# Altium PCB MidBoard.PcbDoc (part 3 of 3)
Units mm, origin at the board's own origin, x right, y up, seen from the top; angles counter-clockwise.
Board outline 150.95 x 96 mm, 2 copper layers (Top Layer, Bottom Layer); 315 components, 238 nets, 1021 pads, 291 vias.
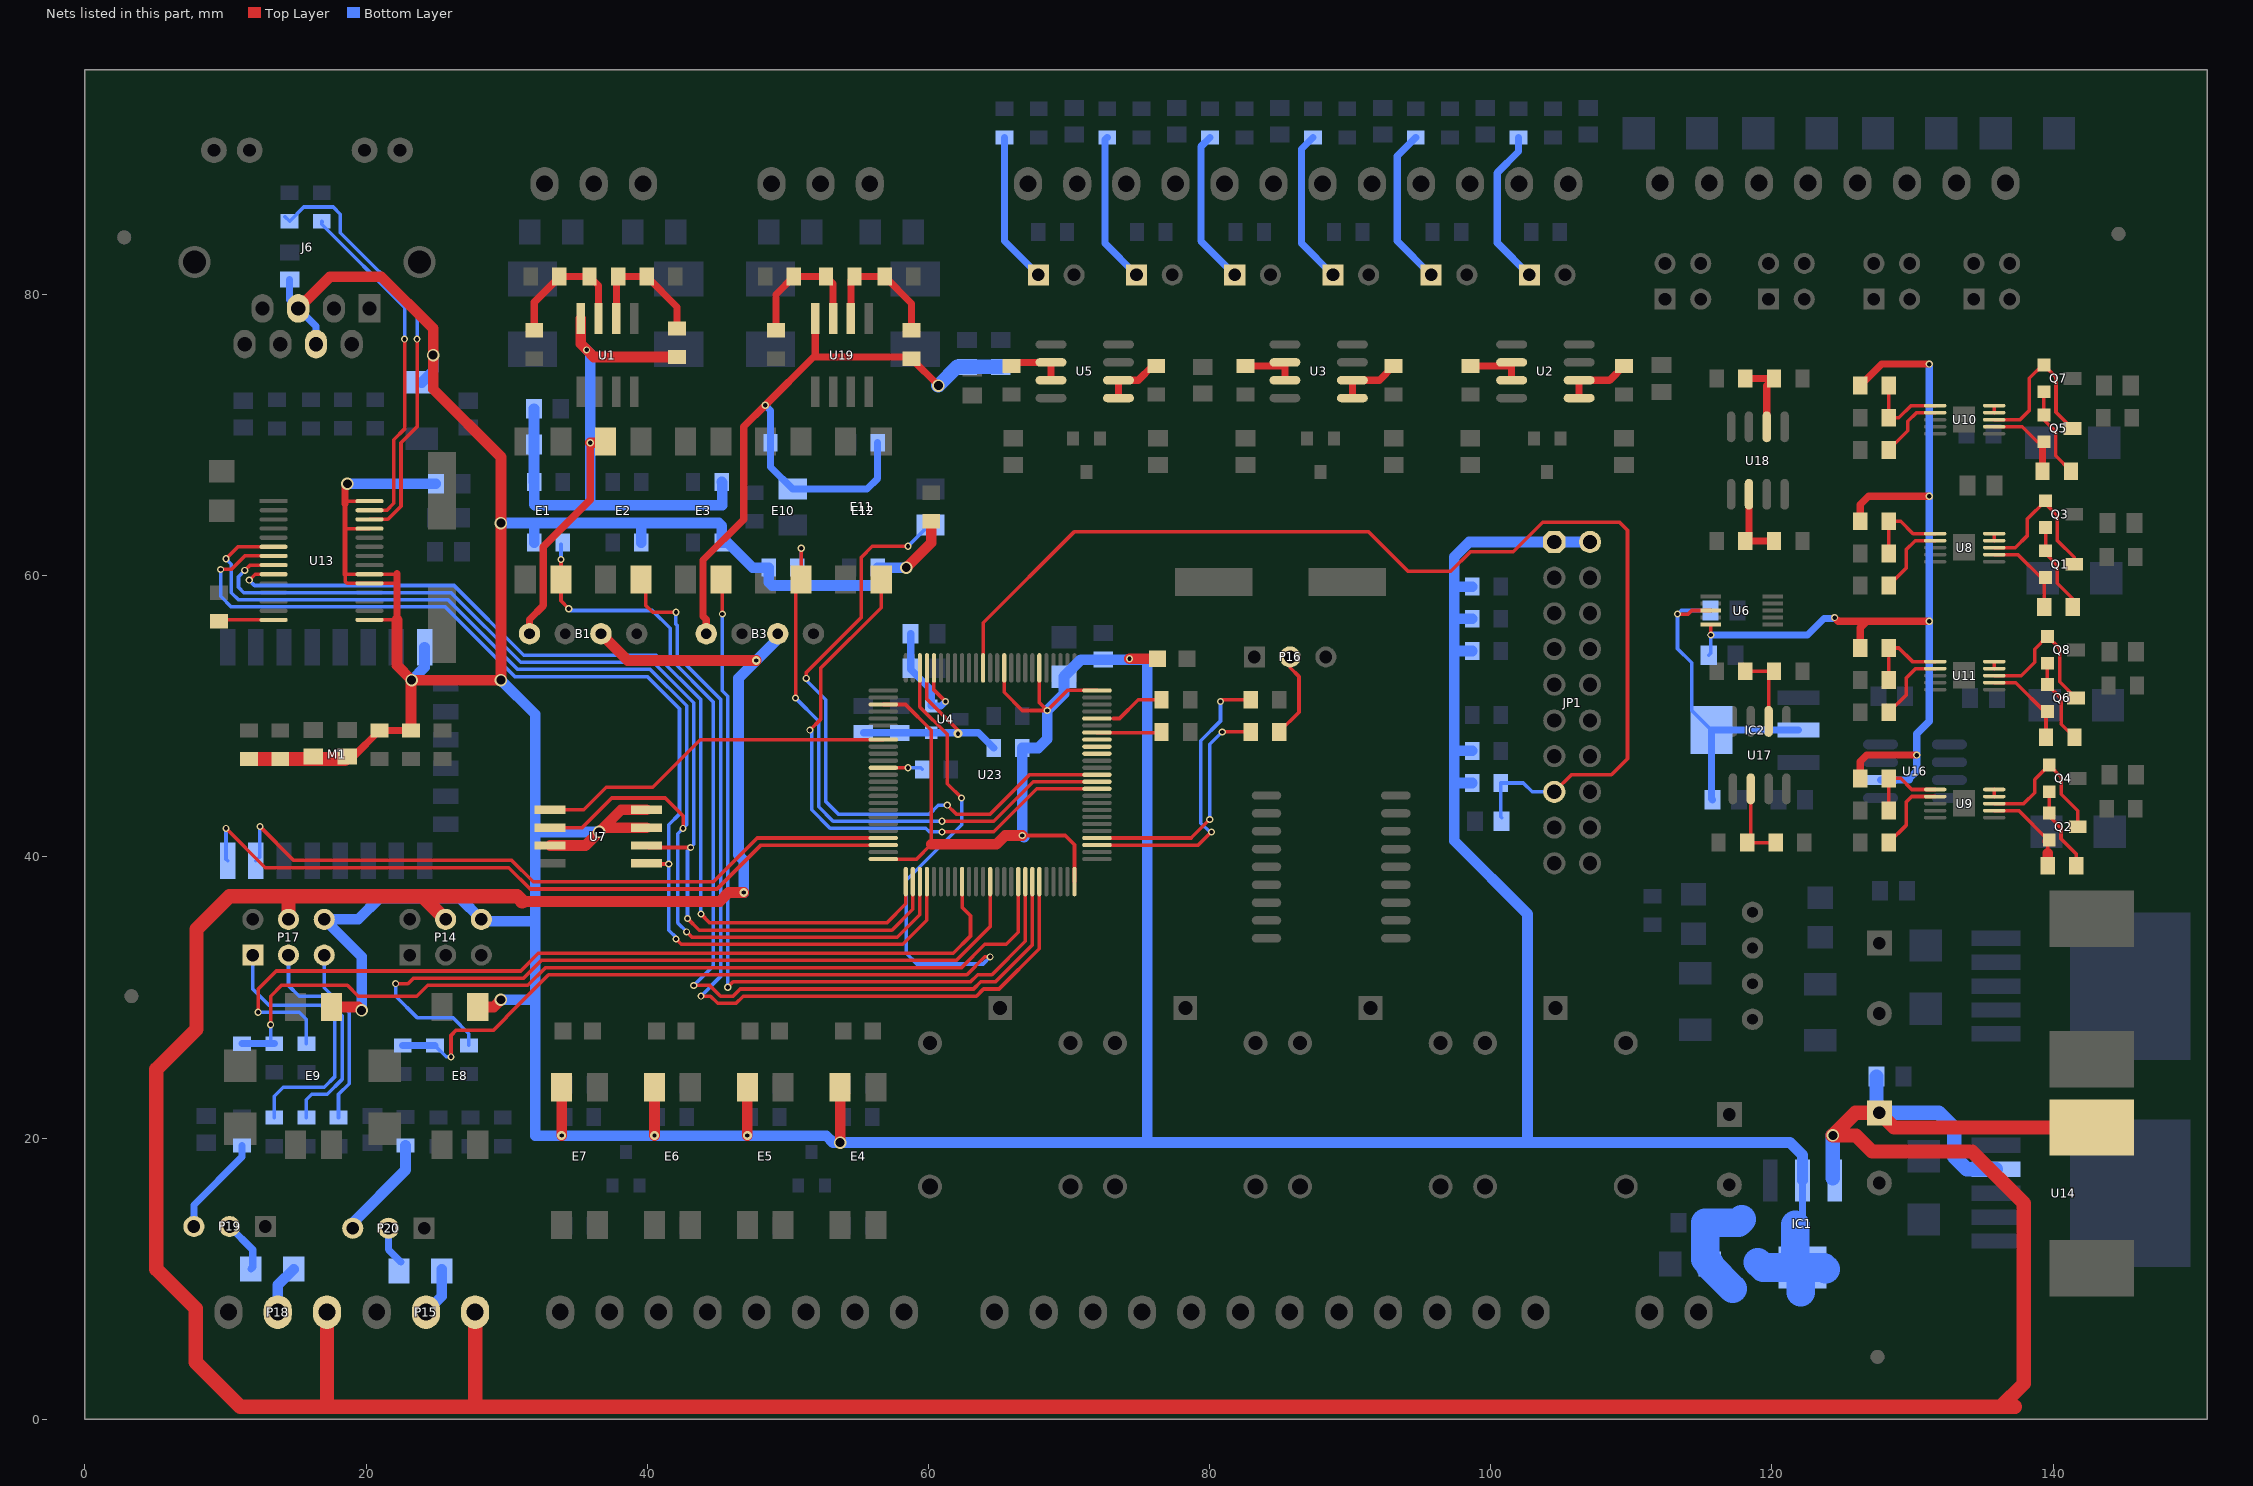
[diagram p3: the nets of this part, all layers, seen from the top]

## Via types
v1: diameter 0.508, hole 0.305, Top Layer to Bottom Layer, tented both sides, 235 vias
v2: diameter 0.635, hole 0.305, Top Layer to Bottom Layer, tented both sides, 33 vias
v3: diameter 0.889, hole 0.635, Top Layer to Bottom Layer, tented both sides, 18 vias
v4: diameter 5, hole 3.3, Top Layer to Bottom Layer, tented both sides, 4 vias
v5: diameter 0.889, hole 0.508, Top Layer to Bottom Layer, tented both sides, 1 vias

## Nets (pads, with @x,y where several pads share a name; then routed paths per layer and width w, separated by ;. In a path a pad name is that pad's centre, name@x,y a point inside that pad or via, vN(x,y) a via of type N, cw(c..) or ccw(c..) an arc to the next point about the centre after c; other vN are vias at no path point) (continued)
NetP16_2: P16.2 R126.2 | length 6.2
  Top Layer w0.254: R126.2@84.963,48.895 86.36,50.292 86.36,52.832 85.725,53.467 P16.2@85.725,54.229
NetP17_1: P17.1 R35.1 | length 19.6
  Bottom Layer w0.254: P17.1@11.938,33.02 11.938,30.607 13.081,29.464 16.764,29.464 17.78,28.448 17.78,24.384 17.018,23.622 14.097,23.622 13.462,22.987 R35.1@13.462,21.463
NetP17_3: P17.3 R36.1 | length 15.8
  Bottom Layer w0.254: P17.3@14.478,33.02 14.478,30.861 15.24,30.099 16.891,30.099 18.288,28.702 18.288,24.174 17.228,23.114 16.129,23.114 15.748,22.733 R36.1@15.748,21.463
NetP17_5: P17.5 R41.1 | length 12.6
  Bottom Layer w0.254: P17.5@17.018,33.02 17.018,30.69 18.796,28.912 18.796,23.876 18.034,23.114 R41.1@18.034,21.463
NetP19_2: P19.2 RT8.2 | length 3.8
  Bottom Layer w0.508: P19.2@10.287,13.716 11.938,12.065 11.938,10.82 RT8.2@11.798,10.681
NetP19_3: P19.3 R52.1 | length 7.2
  Bottom Layer w0.508: P19.3@7.747,13.716 7.747,15.24 11.176,18.669 R52.1@11.176,19.479
NetP20_2: P20.2 RT7.2 | length 2.8
  Bottom Layer w0.508: P20.2@21.59,13.589 21.59,12.065 RT7.2@22.479,11.176
NetP20_3: P20.3 R98.1 | length 7.4
  Bottom Layer w0.762: P20.3@19.05,13.589 19.05,13.97 22.806,17.726 R98.1@22.806,19.478
NetPAIJ1_1: PAIJ1.1 R18.1 | length 11.4
  Bottom Layer w0.508: R18.1@101.981,91.185 101.981,90.188 100.457,88.665 100.457,83.693 PAIJ1.1@102.743,81.407
NetPAIJ2_1: PAIJ2.1 R19.1 | length 11
  Bottom Layer w0.508: R19.1@87.35,91.185 86.531,90.366 86.531,83.649 PAIJ2.1@88.773,81.407
NetPAIJ3_1: PAIJ3.1 R20.1 | length 10.8
  Bottom Layer w0.508: R20.1@72.72,91.185 72.561,91.026 72.561,83.649 PAIJ3.1@74.803,81.407
NetPAIJ4_1: PAIJ4.1 R27.1 | length 11.3
  Bottom Layer w0.508: R27.1@94.665,91.185 93.345,89.865 93.345,83.82 PAIJ4.1@95.758,81.407
NetPAIJ5_1: PAIJ5.1 R28.1 | length 11.1
  Bottom Layer w0.508: R28.1@80.035,91.185 79.375,90.525 79.375,83.82 PAIJ5.1@81.788,81.407
NetPAIJ6_1: PAIJ6.1 R29.1 | length 10.8
  Bottom Layer w0.508: R29.1@65.405,91.185 65.405,83.82 PAIJ6.1@67.818,81.407
NetQ1_1: Q1.1 R46.1 U8.2 | length 6.3
  Top Layer w0.254: U8.2@135.811,61.502 137.507,61.502 139.23,59.779 139.367,59.779 R46.1@139.367,57.785
NetQ1_2: Q1.2 Q3.1 R46.2 | length 6.5
  Top Layer w0.254: Q3.1@139.469,63.436 Q1.2@139.469,61.785 139.469,61.557 140.307,60.719 140.307,59.464 141.399,58.372 R46.2@141.399,57.785
NetQ1_3: Q1.3 Q3.2 U8.3 | length 11.1
  Top Layer w0.254: U8.3@135.811,62.002 137.313,62.002 138.176,62.865 138.176,64.049 Q3.2@139.469,65.341 139.469,65.113 140.307,64.275 140.307,62.512 141.501,61.318 Q1.3@141.501,60.82
NetQ2_1: Q2.1 R48.1 U9.2 | length 6.7
  Top Layer w0.254: U9.2@135.811,43.299 137.549,43.299 139.621,41.227 139.621,41.11 139.621,40.259
  Top Layer w0.762: R48.1@139.621,39.37 139.621,40.259 ; Q2.1@139.621,41.11 Q2.1@139.723,41.212
NetQ2_2: Q2.2 Q4.1 R48.2 | length 6.1
  Top Layer w0.254: Q4.1@139.723,44.64 Q2.2@139.723,43.116 139.723,42.888 140.561,42.05 140.561,41.303 141.653,40.211 R48.2@141.653,39.37
NetQ2_3: Q2.3 Q4.2 U9.3 | length 10.8
  Top Layer w0.254: U9.3@135.811,43.799 137.906,43.799 138.684,44.577 138.684,45.507 Q4.2@139.723,46.545 140.589,45.679 140.589,44.45 141.755,43.284 Q2.3@141.755,42.151
NetQ5_1: Q5.1 R60.1 U10.2 | length 6
  Top Layer w0.254: U10.2@135.811,70.604 137.803,70.604 138.874,69.532 Q5.1@139.342,69.532
  Top Layer w0.508: R60.1@139.24,67.437 Q5.1@139.24,69.431
NetQ5_2: Q5.2 Q7.1 R60.2 | length 6.5
  Top Layer w0.254: Q7.1@139.342,73.088 Q5.2@139.342,71.437 139.342,71.097 140.18,70.259 140.18,68.529 R60.2@141.272,67.437
NetQ5_3: Q5.3 Q7.2 U10.3 | length 11.8
  Top Layer w0.254: U10.3@135.811,71.104 137.652,71.104 138.303,71.755 138.303,74.041 139.255,74.993 Q7.2@139.342,74.993 140.208,74.127 140.208,71.638 Q5.3@141.374,70.472
NetQ6_1: Q6.1 R62.1 U11.2 | length 6.5
  Top Layer w0.254: U11.2@135.811,52.401 137.337,52.401 Q6.1@139.494,50.244 ; R62.1@139.494,48.514 Q6.1@139.494,50.244 ; Q6.1@139.596,50.355 139.494,50.254 Q6.1@139.494,50.244
NetQ6_2: Q6.2 Q8.1 R62.2 | length 6.1
  Top Layer w0.254: Q8.1@139.596,53.784 Q6.2@139.596,52.26 140.589,51.267 140.589,49.451 R62.2@141.526,48.514
NetQ6_3: Q6.3 Q8.2 U11.3 | length 10.7
  Top Layer w0.254: U11.3@135.811,52.901 137.737,52.901 138.684,53.848 138.684,54.778 Q8.2@139.596,55.689 140.462,54.823 140.462,52.461 Q6.3@141.628,51.295
NetR1_2: R1.2 R4.1 R5.1 U1.6 | length 9.6
  Top Layer w0.508: U1.6@37.798,78.292 37.798,81.153 R5.1@37.925,81.28 R4.1@39.957,81.28 42.116,79.121 R1.2@42.116,77.597
NetR5_2: R5.2 R7.1 R8.1 U1.7 | length 10
  Top Layer w0.508: R8.1@31.956,77.47 31.956,79.454 33.734,81.232 R7.1@33.734,81.28 R5.2@35.893,81.28 36.528,80.645 U1.7@36.528,78.292
NetR30_1: R30.1 U5.1 U5.2 | length 4.4
  Top Layer w0.508: U5.1@73.52,72.644 U5.2@73.52,73.914 74.93,73.914 75.946,74.93 R30.1@76.2,74.93
NetR31_1: R31.1 U2.1 U2.2 | length 4.9
  Top Layer w0.508: U2.1@106.286,72.644 U2.2@106.286,73.914 108.458,73.914 R31.1@109.474,74.93
NetR32_1: R32.1 U3.1 U3.2 | length 4.6
  Top Layer w0.508: U3.1@90.157,72.644 U3.2@90.157,73.914 92.075,73.914 R32.1@93.091,74.93
NetR33_1: R33.1 U5.6 U5.7 | length 4.2
  Top Layer w0.508: R33.1@65.913,74.93 66.167,75.184 U5.6@68.72,75.184 U5.7@68.72,73.914
NetR34_2: R34.2 R103.1 R105.1 U19.6 | length 9.9
  Top Layer w0.508: U19.6@54.483,78.292 54.483,81.026 R105.1@54.737,81.28 R103.1@56.896,81.28 58.801,79.375 R34.2@58.801,77.47
NetR38_1: R38.1 U2.6 U2.7 | length 4
  Top Layer w0.508: R38.1@98.552,74.93 U2.6@101.232,74.93 ; U2.7@101.486,73.914 U2.6@101.486,75.184
NetR39_1: R39.1 U3.6 U3.7 | length 4
  Top Layer w0.508: R39.1@82.55,74.93 U3.6@85.23,74.93 ; U3.7@85.357,73.914 U3.6@85.357,75.184
NetR40_2: R40.2 R43.1 U17.2 | length 5.6
  Top Layer w0.254: R43.1@118.237,41.021 R40.2@120.269,41.021 ; R43.1@118.491,41.275 U17.2@118.491,44.844
NetR44_2: R44.2 R45.1 U17.6 | length 5.2
  Top Layer w0.254: R45.1@118.11,53.213 R44.2@120.142,53.213 ; U17.6@119.761,49.644 R44.2@119.761,52.832
NetR47_1: R47.1 U8.7 | length 5.4
  Top Layer w0.254: R47.1@128.318,59.309 129.54,60.531 129.54,61.849 130.193,62.502 U8.7@131.611,62.502
NetR49_2: R49.2 R53.1 U8.6 | length 5.9
  Top Layer w0.254: R53.1@128.318,61.595 R49.2@128.318,63.881 129.159,63.881 130.038,63.002 U8.6@131.611,63.002
NetR50_1: R50.1 U9.7 | length 5.6
  Top Layer w0.254: R50.1@128.318,41.021 129.54,42.243 129.54,43.894 129.945,44.299 U9.7@131.611,44.299
NetR51_2: R51.2 R55.1 U9.6 | length 5.9
  Top Layer w0.254: R55.1@128.318,43.307 R51.2@128.318,45.593 129.159,45.593 129.953,44.799 U9.6@131.611,44.799
NetR57_2: R57.2 R66.1 U18.2 | length 5.1
  Top Layer w0.508: R66.1@118.11,62.484 R57.2@120.142,62.484 ; R66.1@118.364,62.738 U18.2@118.364,65.799
NetR61_1: R61.1 U10.7 | length 4.8
  Top Layer w0.254: R61.1@128.318,68.961 129.667,70.31 129.667,70.993 130.278,71.604 U10.7@131.611,71.604
NetR63_2: R63.2 R67.1 U10.6 | length 5.9
  Top Layer w0.254: R63.2@128.318,73.533 R67.1@128.318,71.247 129.032,71.247 129.889,72.104 U10.6@131.611,72.104
NetR64_1: R64.1 U11.7 | length 5.3
  Top Layer w0.254: R64.1@128.318,50.292 129.54,51.514 129.54,52.705 130.236,53.401 U11.7@131.611,53.401
NetR65_2: R65.2 R69.1 U11.6 | length 5.3
  Top Layer w0.254: R69.1@128.318,52.578 128.318,54.15 ; R65.2@128.318,54.864 129.032,54.864 129.995,53.901 U11.6@131.611,53.901
NetR68_2: R68.2 R70.1 U18.6 | length 5.7
  Top Layer w0.508: R70.1@118.11,74.041 R68.2@120.142,74.041 119.634,73.533 U18.6@119.634,70.599
NetR86_2: R86.2 U13.27 | length 24.8
  Top Layer w0.254: U13.27@20.243,64.662 21.482,64.662 21.971,65.151 21.971,69.679 22.733,70.441 v1(22.733,76.835)
  Bottom Layer w0.254: R86.2@16.891,85.169 R86.2@16.843,85.217 16.843,85.011 22.733,79.121 v1(22.733,76.835)
NetR87_2: R87.2 U13.26 | length 30.9
  Top Layer w0.254: U13.26@20.243,64.012 21.55,64.012 22.479,64.941 22.479,69.469 23.622,70.612 v1(23.622,76.835)
  Bottom Layer w0.254: R87.2@14.22,85.554 R87.2@14.557,85.217 15.573,86.233 17.653,86.233 18.161,85.725 18.161,84.411 23.622,78.95 v1(23.622,76.835)
NetR88_1: R88.1 U13.14 | length 3.9
  Top Layer w0.254: R88.1@9.525,56.769 9.618,56.862 U13.14@13.418,56.862
NetR105_2: R105.2 R106.1 R107.1 U19.7 | length 9.8
  Top Layer w0.508: R107.1@49.149,77.47 49.149,80.01 R106.1@50.419,81.28 R105.2@52.705,81.28 53.213,80.772 U19.7@53.213,78.292
NetR116_2: R116.2 U23.37 | length 2.8
  Top Layer w0.254: U23.37@56.789,46.347 v1(58.539,46.347)
  Bottom Layer w0.254: v1(58.539,46.347) 59.444,46.347 R116.2@59.563,46.228
NetR121_1: R121.1 U23.96 | length 4
  Top Layer w0.254: 73.14,49.847 73.596,49.847 74.93,51.181 R121.1@76.581,51.181
NetR124_2: R124.2 U23.94 | length 4.8
  Top Layer w0.254: U23.94@71.989,48.847 76.533,48.847 R124.2@76.581,48.895 R124.2@76.708,49.022
NetU8_4: U8.4 U8.5 | length 0.5
  Top Layer w0.254: U8.4@135.811,62.502 U8.5@135.811,63.002
NetU9_4: U9.4 U9.5 | length 0.5
  Top Layer w0.254: U9.4@135.811,44.299 U9.5@135.811,44.799
NetU10_4: U10.4 U10.5 | length 0.5
  Top Layer w0.254: U10.4@135.811,71.604 U10.5@135.811,72.104
NetU11_4: U11.4 U11.5 | length 0.5
  Top Layer w0.254: U11.4@135.811,53.401 U11.5@135.811,53.901
PWM_IN1: R99.2 R100.1 U23.23 | length 75.6
  Top Layer w0.254: v1(26.035,25.781) 26.035,27.305 26.416,27.686 29.083,27.686 29.972,28.575 29.972,28.619 32.976,31.623 62.738,31.623 64.008,32.893 v1(64.389,32.893) ; U23.23@59.389,53.447 59.389,50.673 61.341,48.721 61.341,45.212 v1(62.357,44.196)
  Bottom Layer w0.254: R99.2@24.892,26.591 25.702,25.781 v1(26.035,25.781) ; v1(62.357,44.196) 62.357,42.282 58.42,38.345 58.42,33.147 59.182,32.385 63.881,32.385 v1(64.389,32.893)
  Bottom Layer w0.508: R100.1@22.606,26.591 R99.2@24.892,26.591
PWM_IN2: R54.2 R56.1 U23.67 | length 65
  Top Layer w0.254: v1(13.208,28.067) 13.208,30.099 13.982,30.873 18.669,30.873 19.443,30.099 23.61,30.099 24.384,30.873 31.508,30.873 32.766,32.131 62.357,32.131 64.008,33.782 65.532,33.782 66.389,34.639 U23.67@66.389,38.247
  Bottom Layer w0.254: R54.2@13.081,26.718 13.208,26.845 v1(13.208,28.067)
  Bottom Layer w0.508: R56.1@11.176,26.718 13.081,26.718 R54.2@13.462,26.718
PWM_IN_OUT1: P15.2 RT7.1 | length 3.5
  Bottom Layer w0.762: P15.2@24.257,7.62 25.387,8.75 RT7.1@25.387,10.681
PWM_IN_OUT2: P18.2 RT8.1 | length 3.5
  Bottom Layer w0.762: P18.2@13.716,7.62 13.716,9.55 RT8.1@14.846,10.681
PWM_OUT1: R97.2 U23.63 | length 55.2
  Top Layer w0.254: v1(22.098,30.988) 22.975,30.988 23.368,31.381 31.198,31.381 32.456,32.639 61.976,32.639 64.389,35.052 U23.63@64.389,38.247
  Bottom Layer w0.254: v1(22.098,30.988) 22.098,30.099 23.622,28.575 26.162,28.575 27.305,27.432 R97.2@27.305,26.591
PWM_OUT2: R42.2 U23.59 | length 63.4
  Top Layer w0.254: v1(12.319,28.956) 12.319,30.607 13.601,31.889 30.988,31.889 32.246,33.147 61.766,33.147 62.992,34.373 62.992,35.814 62.389,36.417 U23.59@62.389,38.247
  Bottom Layer w0.254: v1(12.319,28.956) 15.24,28.956 15.748,28.448 R42.2@15.748,26.718
RDY/ALERT1: U23.91
REF2.5V: C24.2 C55.2 U4.1 U23.21 | length 9.6
  Top Layer w0.254: U23.21@60.389,53.447 60.389,51.879 v1(61.214,51.054)
  Bottom Layer w0.508: C55.2@58.737,55.88 C24.2@58.737,53.419 58.737,53.336 60.198,51.875 U4.1@60.198,50.736 60.896,50.736 v1(61.214,51.054)
REF5V: C52.1 R49.1 R51.1 R63.1 R65.1 U6.10 U16.6 | length 70
  Top Layer w0.254: v1(115.656,55.794) U6.10@115.656,56.531
  Top Layer w0.508: v1(124.46,57.023) 124.714,56.769 126.746,56.769 ; R51.1@126.286,45.593 126.286,46.784 126.746,47.244 v1(130.302,47.244) ; R65.1@126.286,54.864 126.286,56.309 126.746,56.769 ; R49.1@126.286,63.881 126.286,65.072 126.873,65.659 v1(131.191,65.659) ; R63.1@126.286,73.533 127.81,75.057 v1(131.191,75.057) ; v1(131.191,56.769) 126.746,56.769
  Bottom Layer w0.254: C52.1@115.506,54.356 115.656,54.506 v1(115.656,55.794)
  Bottom Layer w0.508: v1(115.656,55.794) 122.526,55.794 123.696,56.963 124.4,56.963 v1(124.46,57.023) ; U16.6@127.725,45.466 129.794,45.466 129.794,45.593 130.302,46.101 v1(130.302,47.244) 130.302,48.768 131.191,49.657 v1(131.191,56.769) v1(131.191,65.659) v1(131.191,75.057)
RESET: C77.2 JP1.15 R122.1 U23.14 | length 83.6
  Top Layer w0.254: U23.14@63.889,53.447 63.889,56.65 70.358,63.119 91.313,63.119 94.107,60.325 97.155,60.325 98.552,61.722 101.596,61.722 103.694,63.819 109.155,63.819 109.728,63.246 109.728,46.99 108.585,45.847 105.737,45.847 JP1.15@104.519,44.629
  Bottom Layer w0.254: C77.2@100.774,42.799 100.711,42.862 R122.1@100.711,45.26 102.314,45.26 102.945,44.629 JP1.15@104.519,44.629
RS485_CON_1: E2.2 U23.70 | length 64.1
  Top Layer w0.254: E2.2@39.83,59.743 39.878,59.695 39.878,57.912 40.386,57.404 v1(42.037,57.404) ; v1(43.815,30.099) 44.494,30.099 45.002,29.591 46.311,29.591 46.819,30.099 63.413,30.099 63.921,30.607 65.024,30.607 67.889,33.472 U23.70@67.889,38.247
  Bottom Layer w0.254: v1(42.037,57.404) 42.037,56.564 42.129,56.471 42.129,54.3 45.212,51.217 45.212,31.496 v1(43.815,30.099)
RS485_CON_2: E11.2 U23.88 | length 46.8
  Top Layer w0.254: v1(51.308,52.705) 51.308,53.122 55.233,57.047 55.233,61.329 56.007,62.103 v1(58.547,62.103) ; v1(61.341,43.688) 61.976,43.053 64.389,43.053 67.183,45.847 U23.88@71.989,45.847
  Bottom Layer w0.254: v1(51.308,52.705) 51.308,52.578 52.705,51.181 52.705,43.942 53.594,43.053 60.071,43.053 60.706,43.688 v1(61.341,43.688) ; v1(58.547,62.103) 60.071,63.627 E11.2@60.145,63.627
SCL: U23.92
SDA: U23.93
SPI2_MISO: U7.2 U13.6 U23.53 | length 90.1
  Top Layer w0.254: v1(10.033,61.214) 10.881,62.062 U13.6@13.418,62.062 ; U7.2@33.087,42.085 35.354,42.085 37.465,44.196 41.275,44.196 42.545,42.926 v1(42.545,42.037) ; v1(42.799,34.671) 43.18,34.29 57.785,34.29 59.389,35.894 U23.53@59.389,38.247
  Bottom Layer w0.254: v1(10.033,61.214) 10.414,60.833 10.414,58.801 10.922,58.293 25.828,58.293 30.781,53.34 40.215,53.34 42.799,50.756 42.799,42.291 v1(42.545,42.037) 42.164,41.656 42.164,35.306 v1(42.799,34.671)
SPI2_MOSI: U7.5 U13.7 U23.54 | length 81.9
  Top Layer w0.254: v1(9.652,60.452) 10.414,60.452 11.374,61.412 U13.7@13.418,61.412 ; U7.5@39.986,39.497 v1(41.529,39.497) ; v1(42.037,34.163) 42.418,33.782 58.166,33.782 59.889,35.505 U23.54@59.889,38.247
  Bottom Layer w0.254: v1(9.652,60.452) 9.652,58.547 10.414,57.785 25.618,57.785 30.571,52.832 40.005,52.832 42.291,50.546 42.291,43.053 41.529,42.291 v1(41.529,39.497) 41.529,34.798 42.037,34.29 v1(42.037,34.163)
SPI2_NSS: U13.9 U23.51 | length 69.8
  Top Layer w0.254: v1(11.684,59.69) 12.106,60.112 U13.9@13.418,60.112 ; v1(43.815,35.941) 44.45,35.306 57.023,35.306 58.389,36.672 U23.51@58.389,38.247
  Bottom Layer w0.254: v1(11.684,59.69) 12.065,59.309 26.249,59.309 31.202,54.356 40.636,54.356 43.815,51.177 v1(43.815,35.941)
SPI2_SCK: U7.6 U13.8 U23.52 | length 77.1
  Top Layer w0.254: v1(11.367,60.388) 11.74,60.762 U13.8@13.418,60.762 ; U7.6@39.938,40.815 40.081,40.672 v1(43.085,40.672) ; v1(42.862,35.623) 43.688,34.798 57.404,34.798 58.889,36.283 U23.52@58.889,38.247
  Bottom Layer w0.254: v1(11.367,60.388) 10.922,59.944 10.922,59.182 11.303,58.801 26.039,58.801 30.992,53.848 40.426,53.848 43.307,50.967 43.307,40.894 v1(43.085,40.672) 42.862,40.45 v1(42.862,35.623)
STM_RX1: E1.4 R2.1 U23.69 | length 70.3
  Top Layer w0.254: v1(33.861,61.166) E1.4@33.861,59.743 33.861,58.214 v1(34.417,57.658) ; v1(43.307,30.861) 44.45,30.861 45.212,30.099 46.101,30.099 46.609,30.607 63.202,30.607 63.71,31.115 64.77,31.115 67.389,33.734 U23.69@67.389,38.247
  Bottom Layer w0.254: v1(33.861,61.166) R2.1@33.861,62.23 ; v1(34.417,57.658) 34.544,57.531 40.351,57.531 41.621,56.261 41.621,54.089 44.704,51.007 44.704,32.258 v1(43.307,30.861)
STM_RX2: E10.4 R37.1 U23.87 | length 41.7
  Top Layer w0.254: v1(50.546,51.308) 50.546,59.342 E10.4@50.947,59.743 v1(50.947,61.956) ; v1(60.96,42.545) 64.643,42.545 67.445,45.347 U23.87@71.989,45.347
  Bottom Layer w0.254: v1(50.546,51.308) 52.197,49.657 52.197,43.561 53.213,42.545 v1(60.96,42.545) ; R37.1@50.947,60.853 v1(50.947,61.956)
STM_RX3: M1.22 U23.48 | length 52.2
  Top Layer w0.254: v1(10.033,42.037) 12.827,39.243 30.143,39.243 31.667,37.719 44.958,37.719 48.086,40.847 U23.48@56.789,40.847
  Bottom Layer w0.254: v1(10.033,42.037) 10.033,39.847 M1.22@10.157,39.723
STM_RX4: R126.1 U23.79 | length 17.9
  Top Layer w0.254: U23.79@71.989,41.347 78.693,41.347 ; 77.978,41.355 78.693,41.355 v1(80.01,42.672) ; v1(80.899,48.895) R126.1@82.931,48.895
  Bottom Layer w0.254: v1(80.01,42.672) 80.01,48.006 v1(80.899,48.895)
STM_TX1: E3.2 U23.68 | length 56.4
  Top Layer w0.254: E3.2@45.251,59.743 45.339,59.655 v1(45.339,57.277) ; E3.2@45.545,59.743 E3.2@45.593,59.695 ; v1(45.72,30.734) 46.101,31.115 62.992,31.115 63.5,31.623 64.516,31.623 66.897,34.004 66.897,35.465 ; U23.68@66.889,38.247 66.889,35.473 66.897,35.465 ; 66.897,35.814 66.897,35.465
  Bottom Layer w0.254: v1(45.339,57.277) 45.339,51.816 45.335,51.812 45.72,51.428 v1(45.72,30.734)
STM_TX2: E12.2 U23.86 | length 40.8
  Top Layer w0.254: v1(51.562,49.022) 52.324,49.784 52.324,53.42 56.642,57.738 E12.2@56.642,59.743 ; v1(60.96,41.783) 64.643,41.783 67.707,44.847 U23.86@71.989,44.847
  Bottom Layer w0.254: v1(51.562,49.022) 51.689,48.895 51.689,43.351 53.003,42.037 59.817,42.037 60.071,41.783 v1(60.96,41.783)
STM_TX3: M1.21 U23.47 | length 49.8
  Top Layer w0.254: v1(12.446,42.164) 14.859,39.751 30.353,39.751 31.877,38.227 44.704,38.227 47.824,41.347 U23.47@56.789,41.347
  Bottom Layer w0.254: M1.21@12.157,39.723 12.446,40.012 v1(12.446,42.164)
STM_TX4: R125.1 U23.78 | length 21.7
  Top Layer w0.254: U23.78@71.989,40.847 79.201,40.847 ; 78.486,40.839 79.193,40.839 79.201,40.847 ; v1(80.137,41.783) 79.201,40.847 ; v1(80.772,51.054) 80.899,51.181 R125.1@82.931,51.181
  Bottom Layer w0.254: v1(80.137,41.783) 80.001,41.783 79.375,42.409 79.375,48.269 80.772,49.666 v1(80.772,51.054)
VCC5V: C19.1 C49.1 IC2.2 IC2.4 U6.8 | length 25.4
  Top Layer w0.254: v1(113.284,57.277) 114.046,57.277 114.3,57.531 U6.8@115.656,57.531
  Bottom Layer w0.254: C19.1@115.633,57.531 113.538,57.531 v1(113.284,57.277) 113.284,54.82 114.3,53.804 114.3,50.419 IC2.4@115.697,49.022
  Bottom Layer w0.508: C49.1@115.76,44.069 115.697,44.133 IC2.4@115.697,49.022 IC2.2@121.897,49.022
VCC_485-1: B1.4 C41.2 C42.2 E2.4 R1.1 R3.1 R9.1 U1.8 | length 58.7
  Top Layer w0.508: B1.4@31.623,55.88 31.623,56.896 32.603,57.876 32.603,62.067 35.941,65.405 v1(35.941,69.469)
  Top Layer w0.762: U1.8@35.258,78.292 35.258,76.502 v1(35.687,76.073) 36.195,75.565 R1.1@42.116,75.565 ; v1(35.941,69.469) E2.4@37.216,69.469
  Bottom Layer w0.762: C42.2@31.941,71.882 C41.2@31.941,69.342 31.941,66.69 R3.1@31.956,66.675 31.956,65.072 32.004,65.024 35.941,65.024 ; v1(35.687,76.073) 35.941,75.819 v1(35.941,69.469) 35.941,65.024 ; R9.1@45.291,66.675 45.339,66.627 45.339,65.024 35.941,65.024
VCC_485-2: B3.4 C40.2 C46.2 E11.4 R34.1 R102.1 R109.1 U19.8 | length 56.2
  Top Layer w0.508: B3.4@44.196,55.88 44.196,56.896 43.969,57.123 43.969,61.114 46.863,64.008 46.863,70.612 v1(48.387,72.136) 51.816,75.565 ; U19.8@51.943,78.292 51.943,75.692 51.816,75.565 ; v3(60.706,73.533) R34.1@58.801,75.438 58.674,75.565 51.816,75.565
  Bottom Layer w0.508: v1(48.387,72.136) 48.768,71.755 R102.1@48.768,69.469 48.768,67.744 E11.4@50.345,66.167 55.626,66.167 56.388,66.929 R109.1@56.388,69.469
  Bottom Layer w1.016: v3(60.706,73.533) 62.039,74.866 C46.2@62.738,74.866 C40.2@65.151,74.866
VDD3.3V: C28.2 C32.2 C38.1 C39.1 C75.1 C76.2 C80.1 C81.1 D26.1 E4.4 E5.4 E6.4 E7.4 E8.1 E9.1 IC1.2 IC1.4 J6.4 J6.5 JP1.1 JP1.2 L1.1 M1.8 P14.6 P17.6 R2.2 R6.2 R11.2 R37.2 R71.1 R104.2 R110.2 R117.2 R118.2 R119.2 R120.2 R122.2 R127.2 R128.2 R129.1 R130.1 U7.3 U7.7 U7.8 U13.15 U13.19 U13.20 U13.25 U13.28 U23.6 U23.11 U23.28 U23.50 U23.75 U23.100 | length 514.8
  Top Layer w0.254: 18.501,65.11 18.703,65.312 U13.28@20.243,65.312 ; 18.512,63.362 U13.25@20.243,63.362 ; U13.15@20.243,56.862 22.191,56.862 ; 22.139,60.112 U13.20@20.243,60.112 18.501,60.112 18.501,59.604 18.643,59.462 U13.19@20.243,59.462 22.165,59.462 ; U23.50@56.789,39.847 59.151,39.847 60.198,40.894 60.198,49.022 58.373,50.847 U23.28@56.789,50.847 ; U23.11@65.389,53.447 65.389,51.705 66.675,50.419 v1(68.453,50.419) ; v1(66.675,41.529) 69.723,41.529 70.389,40.863 U23.75@70.389,38.247 ; U23.6@67.889,53.447 67.889,50.983 v1(68.453,50.419) ; U23.100@71.989,51.847 69.881,51.847 v1(68.453,50.419)
  Top Layer w0.381: 18.501,60.112 18.501,65.11
  Top Layer w0.508: 18.501,65.11 18.501,66.38 v3(18.669,66.548) ; C81.1@18.646,47.132 19.085,47.132 R129.1@20.952,49 R130.1@23.188,49 ; 22.191,56.862 22.191,60.164
  Top Layer w0.762: J6.5@15.167,79.019 17.427,81.28 21.082,81.28 24.765,77.597 v3(24.765,75.692) 24.765,73.279 29.591,68.453 v3(29.591,63.754) v3(29.591,52.578) v3(23.241,52.578) ; E9.1@17.526,29.332 19.436,29.332 v3(19.685,29.083) ; 22.191,56.862 22.191,53.628 v3(23.241,52.578) ; R130.1@23.188,49 23.188,52.525 v3(23.241,52.578) ; E8.1@27.94,29.332 29.078,29.332 v3(29.591,29.845) ; U7.3@33.087,40.815 35.608,40.815 v3(36.576,41.783) v3@36.878,42.085 ; v2(33.909,20.193) E7.4@33.909,23.617 ; U7.7@39.938,42.085 v3@36.878,42.085 ; U7.8@39.938,43.355 38.148,43.355 v3@36.878,42.085 ; v2(40.513,20.193) E6.4@40.513,23.617 ; v2(47.117,20.193) E5.4@47.117,23.617 ; v3(53.721,19.685) E4.4@53.721,23.617 ; v3(58.42,60.579) 60.198,62.357 R104.2@60.198,63.881 ; 60.198,40.894 64.832,40.894 65.467,41.529 v1(66.675,41.529) ; v1(74.295,54.102) D26.1@76.293,54.102
  Top Layer w1.016: R127.2@11.656,46.968 R128.2@13.891,46.968 18.481,46.968 C81.1@18.646,47.132
  Bottom Layer w0.508: C32.2@14.557,81.089 14.557,79.629 J6.5@15.167,79.019 16.437,77.749 J6.4@16.437,76.479 ; IC1.4@122.174,10.795 IC1.2@122.174,16.995
  Bottom Layer w0.762: v3(18.669,66.548) C28.2@24.956,66.548 ; v3(19.685,29.083) 19.685,32.893 P17.6@17.018,35.56 19.431,35.56 20.955,37.084 26.67,37.084 P14.6@28.194,35.56 28.321,35.433 32.026,35.433 ; v3(23.241,52.578) 24.157,53.494 M1.8@24.157,54.923 ; L1.1@23.955,73.755 24.765,74.565 v3(24.765,75.692) ; v3(29.591,29.845) 32.026,29.845 ; v3(29.591,52.578) 32.026,50.143 32.026,41.783 ; v3(29.591,63.754) 45.085,63.754 45.291,63.548 R11.2@45.291,62.357 45.72,62.357 47.498,60.579 R37.2@48.641,60.579 48.641,59.563 48.895,59.309 56.261,59.309 56.388,59.436 R110.2@56.388,60.579 v3(58.42,60.579) ; R2.2@31.956,62.357 31.956,63.675 ; v3(36.576,41.783) 32.026,41.783 ; R6.2@39.576,62.357 39.576,63.706 ; v1@66.802,41.402 v1(66.675,41.529) R71.1@66.675,47.752 67.818,47.752 68.453,48.387 v1(68.453,50.419) 69.644,51.61 C75.1@69.644,52.829 70.854,54.038 C76.2@72.438,54.038 75.501,54.038 75.565,53.975 75.565,19.685 ; 97.457,45.26 R122.2@98.679,45.26 ; 97.457,54.658 R120.2@98.679,54.658 ; 97.488,56.944 R119.2@98.679,56.944 ; 97.488,59.23 R118.2@98.679,59.23 ; R117.2@98.679,47.546 97.488,47.546 97.409,47.625 ; JP1.2@107.059,62.409 JP1.1@104.519,62.409 98.477,62.409 97.409,61.341 97.409,47.625 ; IC1.2@122.174,16.995 122.174,18.796 121.285,19.685 102.616,19.685 ; 32.026,29.845 32.026,35.433 ; 32.026,29.845 32.026,20.171 47.117,20.171 52.727,20.171 53.213,19.685 v3(53.721,19.685) 75.565,19.685 ; 32.026,35.433 32.026,41.783 ; 75.565,19.685 102.616,19.685 ; 97.409,47.625 97.409,41.148 102.616,35.941 102.616,19.685
  Bottom Layer w2.032: 117.221,9.271 115.573,10.919 C38.1@115.573,11.049 115.252,11.37 C39.1@115.252,13.97 117.602,13.97 117.856,14.224 ; 118.999,11.176 119.38,10.795 IC1.4@122.174,10.795 ; 121.666,13.843 121.666,11.303 IC1.4@122.174,10.795 ; 122.047,9.041 122.047,10.668 IC1.4@122.174,10.795 ; IC1.4@123.825,10.668 123.698,10.795 IC1.4@122.174,10.795
VDD5V: B1.2 B3.2 C35.1 C36.2 IC1.1 L2.2 P14.4 P15.3 P17.4 P18.3 U14.4 | length 319.8
  Top Layer w0.762: 31.115,36.83 45.147,36.83 45.782,37.465 v2(46.863,37.465) ; B1.2@36.703,55.88 38.608,53.975 v2(47.752,53.975)
  Top Layer w1.016: P17.4@14.478,35.56 14.478,37.084 14.605,37.211 ; 17.216,0.96 P18.3@17.216,7.62 ; P14.4@25.654,35.56 24.003,37.211 ; 27.757,0.96 P15.3@27.757,7.62 ; 31.115,36.83 30.734,37.211 24.003,37.211 ; 137.287,0.889 136.271,0.889 ; L2.2@142.748,20.748 128.691,20.748 C35.1@127.635,21.804 125.944,21.804 v3(124.333,20.193) 125.984,20.193 127.127,19.05 134.239,19.05 137.922,15.367 137.922,2.54 136.271,0.889 ; 14.605,37.211 24.003,37.211 ; 14.605,37.211 10.287,37.211 7.938,34.861 7.938,27.749 5.08,24.892 5.08,10.668 7.874,7.874 7.874,4.064 11.049,0.889 136.271,0.889
  Bottom Layer w0.762: v2(46.863,37.465) 46.863,39.751 46.482,40.132 46.482,52.705 v2(47.752,53.975) B3.2@49.403,55.626
  Bottom Layer w1.016: IC1.1@124.333,17.136 v3(124.333,20.193) ; C35.1@127.444,21.995 C36.2@127.444,24.384 ; C35.1@127.635,21.804 131.866,21.804 132.969,20.701 132.969,18.669 133.857,17.781 U14.4@135.936,17.781
VDDA: C22.2 C23.2 R71.2 U4.2 U23.22 | length 15.3
  Top Layer w0.254: U23.22@59.889,53.447 59.889,51.236 62.103,49.022 v2(62.103,48.768)
  Bottom Layer w0.508: C23.2@55.372,48.831 C22.2@57.96,48.831 U4.2@60.198,48.831 63.563,48.831 R71.2@64.643,47.752
W25X16_CS: U7.1 U23.33 | length 25.8
  Top Layer w0.254: U7.1@33.087,43.355 35.481,43.355 37.084,44.958 40.386,44.958 43.775,48.347 U23.33@56.789,48.347
pads on no net: J6.7 J6.8 JP1.11 JP1.17 JP1.19 M1.2 M1.4 M1.5 M1.6 M1.7 M1.9 M1.10 M1.11 M1.12 M1.13 M1.14 M1.19 M1.20 U8.8 U9.8 U10.8 U11.8 U12.15 U12.16 U12.17 U12.18 U13.3 U13.5 U14.6 U15.6 U16.1 U16.3 U16.5 U16.7 U23.1 U23.2 U23.3 U23.4 U23.5 U23.7 U23.8 U23.9 U23.18 U23.32 U23.34 U23.35 U23.36 U23.38 U23.43 U23.44 U23.45 U23.46 U23.60 U23.61 U23.62 U23.64 U23.65 U23.66 U23.71 U23.73 U23.80 U23.85 U23.95 U23.97 U23.98
copper on no net:
  other v4: 3,3 147.95,3 3,93 147.95,93

## Polygon pours and split planes (outlines as drawn)
GND on Bottom Layer "Top Layer-No Net" (solid, remove dead copper, pour order 9): 28.829,73.66 28.956,73.533 28.956,62.103 29.845,61.214 65.405,61.214 68.79,64.599 108.375,64.599 109.728,63.246 109.728,32.893 112.903,29.718 126.619,29.718 129.159,32.258 129.159,37.465 148.59,37.465 150.114,35.941 150.114,8.255 148.082,6.223 123.571,6.223 120.269,9.525 113.284,9.525 113.284,4.826 112.649,4.191 112.522,4.318 107.315,4.318 105.664,5.969 105.664,10.668 34.544,10.668 29.21,16.002 7.493,16.002 7.493,73.66
ASSA on Bottom Layer "Top Layer-No Net" (solid, remove dead copper, pour order 7): 61.849,79.629 70.993,79.629 107.696,79.629 109.347,77.978 114.935,77.978 148.844,77.978 150.622,76.2 150.876,75.946 150.876,57.15 150.876,40.132 149.606,38.862 149.098,38.354 124.968,38.354 124.968,36.449 124.46,35.941 123.571,35.052 117.602,35.052 114.173,35.052 111.633,37.592 111.506,37.719 111.506,45.466 111.506,64.643 110.744,65.405 110.236,65.913 92.329,65.913 63.881,65.913 61.849,67.945
VDD3.3V on Bottom Layer "Top Layer-No Net" (solid, remove dead copper, pour order 10): 114.3,15.367 124.841,15.367 124.841,8.382 124.587,8.128 118.364,8.128 116.84,8.128 114.3,10.668
GND on Top Layer "Top Layer-No Net" (solid, remove dead copper, pour order 8): 28.829,73.66 28.956,73.533 28.956,62.103 29.845,61.214 65.405,61.214 68.79,64.599 108.375,64.599 109.728,63.246 109.728,32.893 112.903,29.718 126.619,29.718 129.159,32.258 129.159,37.465 148.59,37.465 150.114,35.941 150.114,8.255 148.082,6.223 123.571,6.223 120.269,9.525 113.284,9.525 113.284,4.826 112.649,4.191 112.522,4.318 107.315,4.318 105.664,5.969 105.664,10.668 34.544,10.668 29.21,16.002 7.493,16.002 7.493,73.66
ASSA on Top Layer "Top Layer-No Net" (solid, remove dead copper, pour order 6): 61.849,79.629 70.993,79.629 107.696,79.629 109.347,77.978 114.935,77.978 148.844,77.978 150.622,76.2 150.876,75.946 150.876,57.15 150.876,40.132 149.606,38.862 149.098,38.354 124.968,38.354 124.968,36.449 124.46,35.941 123.571,35.052 117.602,35.052 114.173,35.052 111.633,37.592 111.506,37.719 111.506,45.466 111.506,64.643 110.744,65.405 110.236,65.913 92.329,65.913 63.881,65.913 61.849,67.945

## Keep-outs
Keep-Out Layer:
  circle w0.254: c10.112,85.598 r1.778
  circle w0.254: c21.542,85.598 r1.778
  lines w0.254: 0,0 150.95,0 150.95,96 0,96 0,0

## Silkscreen, mask and mechanical layers (free items; w line width, h text height)
Top Overlay:
  lines w0.254: 7.493,15.875 10.033,15.875 ; 10.16,15.367 12.7,15.367 ; 18.796,15.875 21.59,15.875 ; 21.59,15.367 24.257,15.367
  text "GND" at 127.466,85.646 h1.02 r180
  text "G2" at 50.165,85.598 h1.02 r180
  text "B2" at 53.086,85.598 h1.02 r180
  text "A2" at 56.642,85.598 h1.02 r180
  text "GND" at 113.157,85.598 h1.02 r180
  text "AO4" at 116.713,85.598 h1.02 r180
  text "GND" at 120.396,85.598 h1.02 r180
  text "AO3" at 123.825,85.598 h1.02 r180
  text "AO2" at 131.064,85.598 h1.02 r180
  text "GND" at 134.62,85.598 h1.02 r180
  text "AO1" at 137.922,85.598 h1.02 r180
  text "G1" at 33.528,85.471 h1.02 r180
  text "B1" at 36.449,85.471 h1.02 r180
  text "A1" at 40.005,85.471 h1.02 r180
  text "AI6" at 67.945,85.09 h1.02 r180
  text "GND" at 71.655,85.09 h1.02 r180
  text "AI5" at 75.026,85.09 h1.02 r180
  text "GND" at 78.736,85.09 h1.02 r180
  text "AI4" at 82.107,85.09 h1.02 r180
  text "GND" at 85.817,85.09 h1.02 r180
  text "AI3" at 89.189,85.09 h1.02 r180
  text "GND" at 92.899,85.09 h1.02 r180
  text "2I1" at 95.931,85.09 h1.02 r180
  text "GND" at 99.98,85.09 h1.02 r180
  text "AI1" at 103.013,85.09 h1.02 r180
  text "GND" at 107.061,85.09 h1.02 r180
  text "20mA" at 70.993,79.375 h1.02 r180
  text "20mA" at 91.948,79.375 h1.02 r180
  text "20mA" at 98.933,79.375 h1.02 r180
  text "20mA" at 105.918,79.375 h1.02 r180
  text "20mA" at 78.232,79.248 h1.02 r180
  text "20mA" at 84.963,79.248 h1.02 r180
  text "I" at 137.033,76.835 h1.02
  text "V" at 134.239,76.708 h1.02
  text "V" at 112.151,76.581 h1.02
  text "I" at 114.681,76.581 h1.02
  text "V" at 119.38,76.581 h1.02
  text "I" at 122.428,76.581 h1.02
  text "V" at 126.873,76.581 h1.02
  text "I" at 129.794,76.581 h1.02
  text "ZJZB20171126V4.0" at 2.159,60.706 h1.5 r270
  text "RX" at 93.091,53.467 h1.02 r90
  text "GND" at 94.869,53.467 h1.02 r90
  text "TX" at 91.313,53.34 h1.02 r90
  text "24V" at 21.336,37.386 h0.76
  text "5V" at 24.638,37.386 h0.76
  text "3.3V" at 27.178,37.386 h0.76
  text "24V" at 10.414,37.259 h0.76
  text "5V" at 13.335,37.259 h0.76
  text "3.3V" at 15.748,37.259 h0.76
  text "IN" at 8.001,16.256 h1.02
  text "OUT" at 10.414,16.256 h1.02
  text "IN" at 19.304,16.256 h1.02
  text "OUT" at 21.59,16.256 h1.02
  text "COM2" at 88.011,12.319 h1.02
  text "COM1" at 98.044,12.319 h1.02
  text "COM4" at 66.421,12.192 h1.02
  text "COM3" at 77.47,12.192 h1.02
  text "NC4" at 63.627,10.287 h1.02
  text "NO4" at 70.485,10.287 h1.02
  text "NC3" at 74.168,10.287 h1.02
  text "NO3" at 81.026,10.287 h1.02
  text "NC2" at 84.582,10.287 h1.02
  text "NO2" at 91.567,10.287 h1.02
  text "NC1" at 95.25,10.287 h1.02
  text "NO1" at 101.981,10.287 h1.02
  text "GND" at 8.636,10.16 h1.02
  text "PWM2" at 11.938,10.16 h1.02
  text "5V" at 16.51,10.16 h1.02
  text "GND" at 19.304,10.16 h1.02
  text "PWM1" at 22.733,10.16 h1.02
  text "5V" at 27.051,10.16 h1.02
  text "GND" at 32.639,10.16 h1.02
  text "DI3" at 35.941,10.16 h1.02
  text "GND" at 39.37,10.16 h1.02
  text "DI2" at 42.799,10.16 h1.02
  text "GND" at 46.482,10.16 h1.02
  text "DI1" at 50.292,10.16 h1.02
  text "GND" at 53.594,10.16 h1.02
  text "DI0" at 57.277,10.16 h1.02
  text "GND" at 109.855,10.033 h1.02
  text "24V" at 113.792,10.033 h1.02

## Dimensions
0,96 to 0,0 on Top Overlay
0,0 to 150.95,0 on Top Overlay

## Text inside footprints (layer, text, board x,y; h text height)
C35: Mechanical 26 "C6" at 129.535,20.111 h0.76 r270
C37: Mechanical 26 "C6" at 118.867,19.984 h0.76 r270
C44: Mechanical 26 "C6" at 129.535,32.176 h0.76 r270
D17: Mechanical 26 "D8" at 55.58,27.996 h0.76 r180
D19: Mechanical 26 "D8" at 48.934,27.996 h0.76 r180
D20: Mechanical 26 "D8" at 42.288,27.996 h0.76 r180
D22: Mechanical 26 "D8" at 35.641,27.996 h0.76 r180
D26: Mechanical 26 "D8" at 77.932,54.491 h0.76 r180
JP1: Top Overlay "20" at 107.567,36.628 h0.76 r90; Top Overlay "19" at 104.773,36.755 h0.76 r90; Top Overlay "2" at 107.186,64.187 h0.76 r90; Top Overlay "1" at 104.9,64.314 h0.76 r90
U12: Mechanical 26 "U21" at 88.146,40.329 h0.76 r270